# Altium PCB Khoa so dien tu.PcbDoc
Units mm, origin at the board's own origin, x right, y up, seen from the top; angles counter-clockwise.
Board outline 110.74 x 92.46 mm, 2 copper layers (Top Layer, Bottom Layer); 29 components, 32 nets, 111 pads, 12 vias.
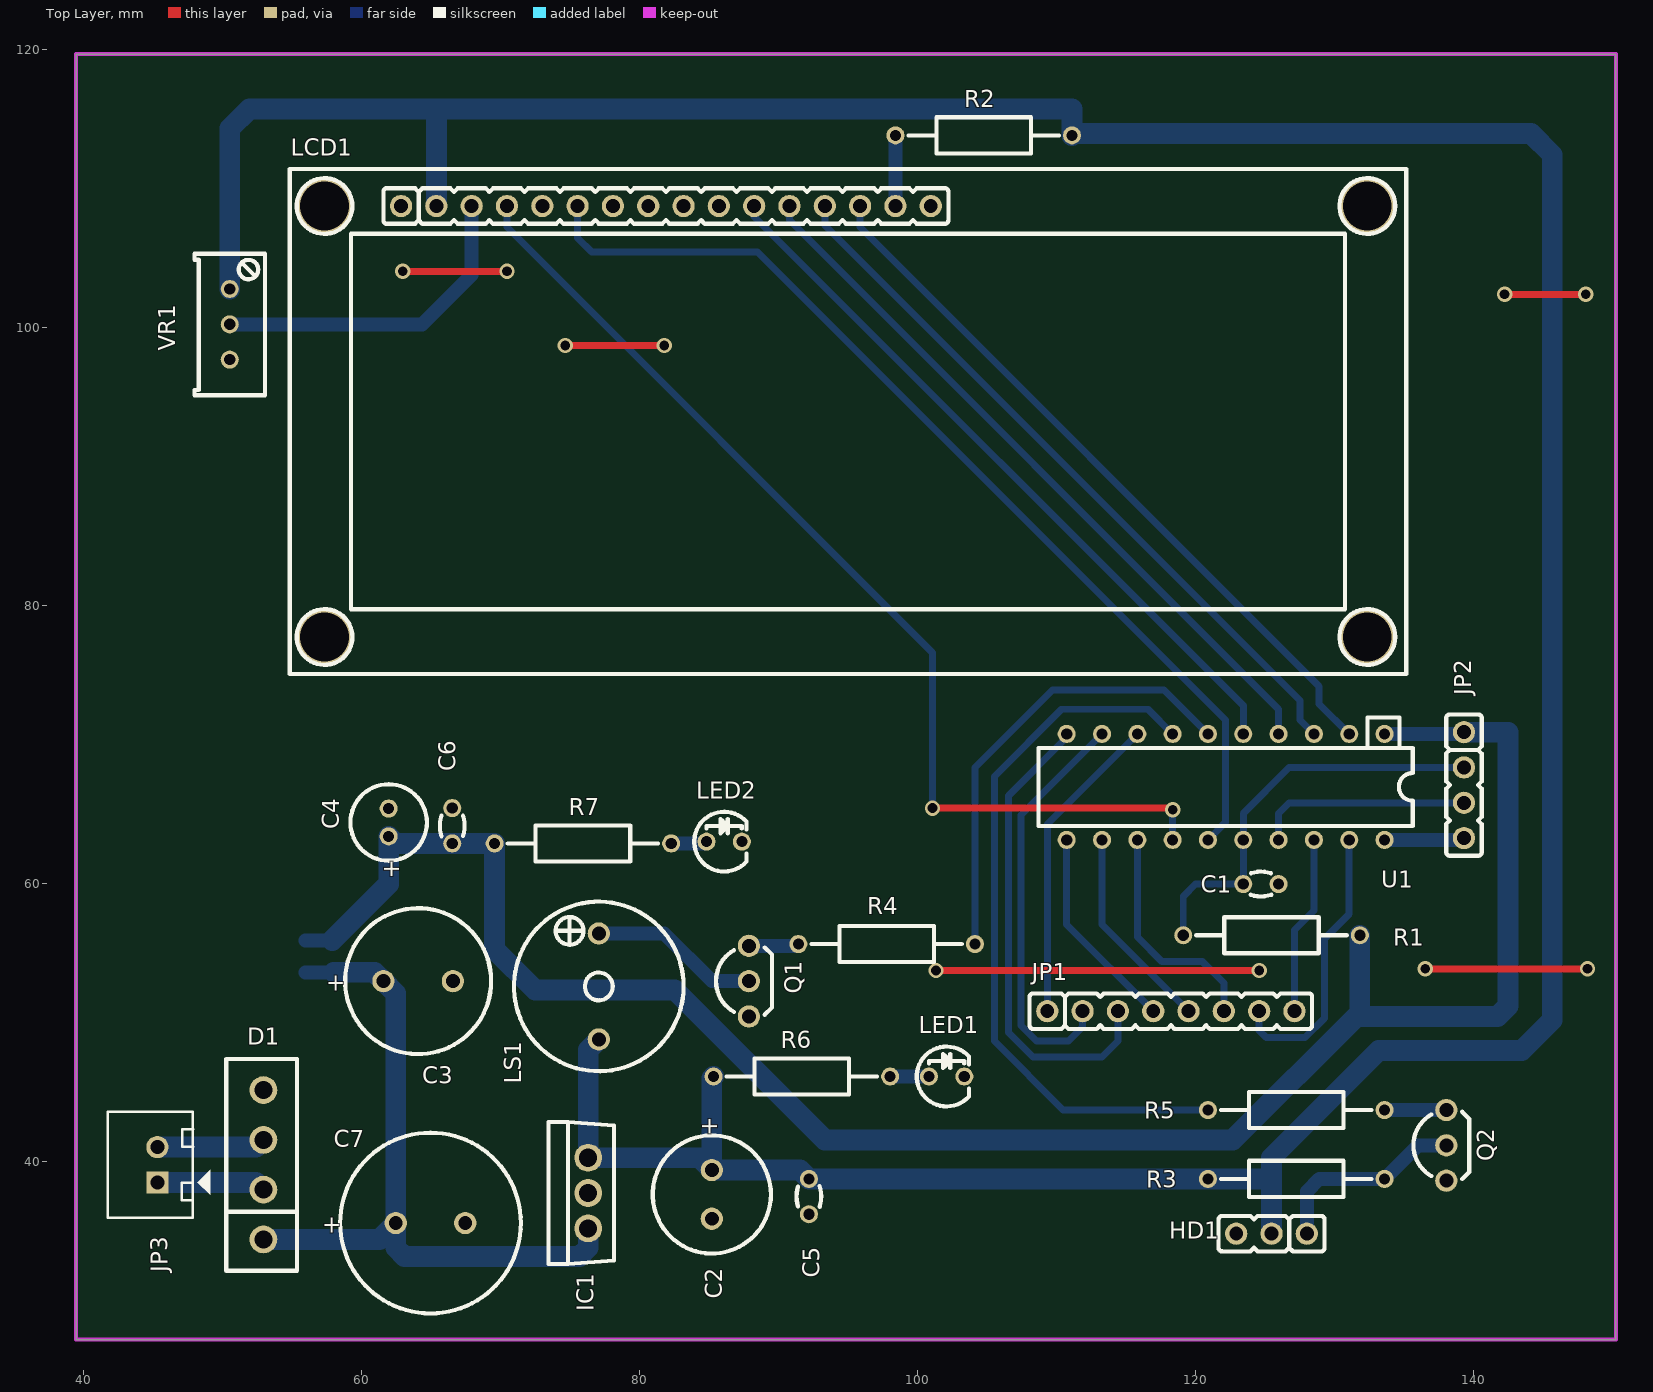
[diagram p0: Top Layer view]
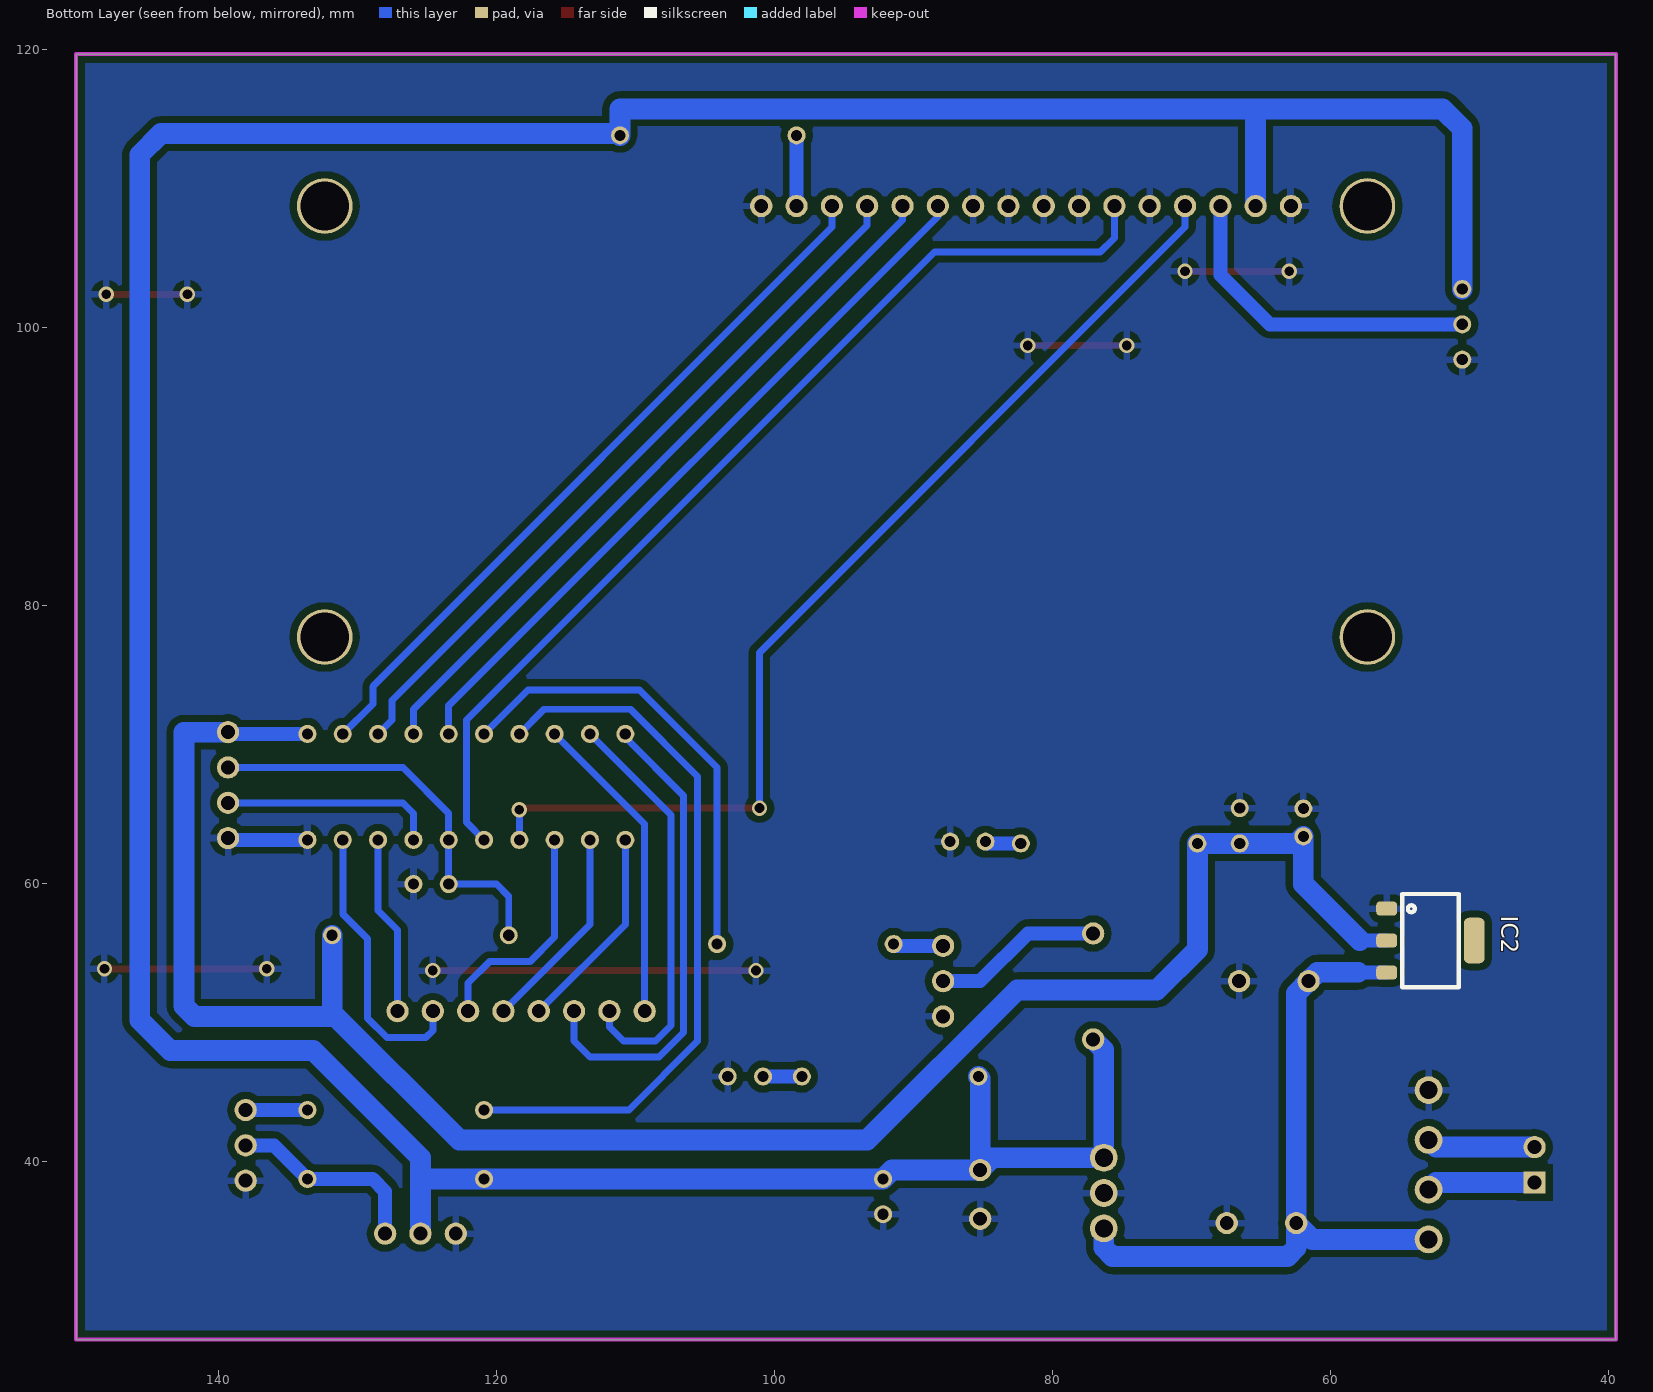
[diagram p1: Bottom Layer view, seen from below]
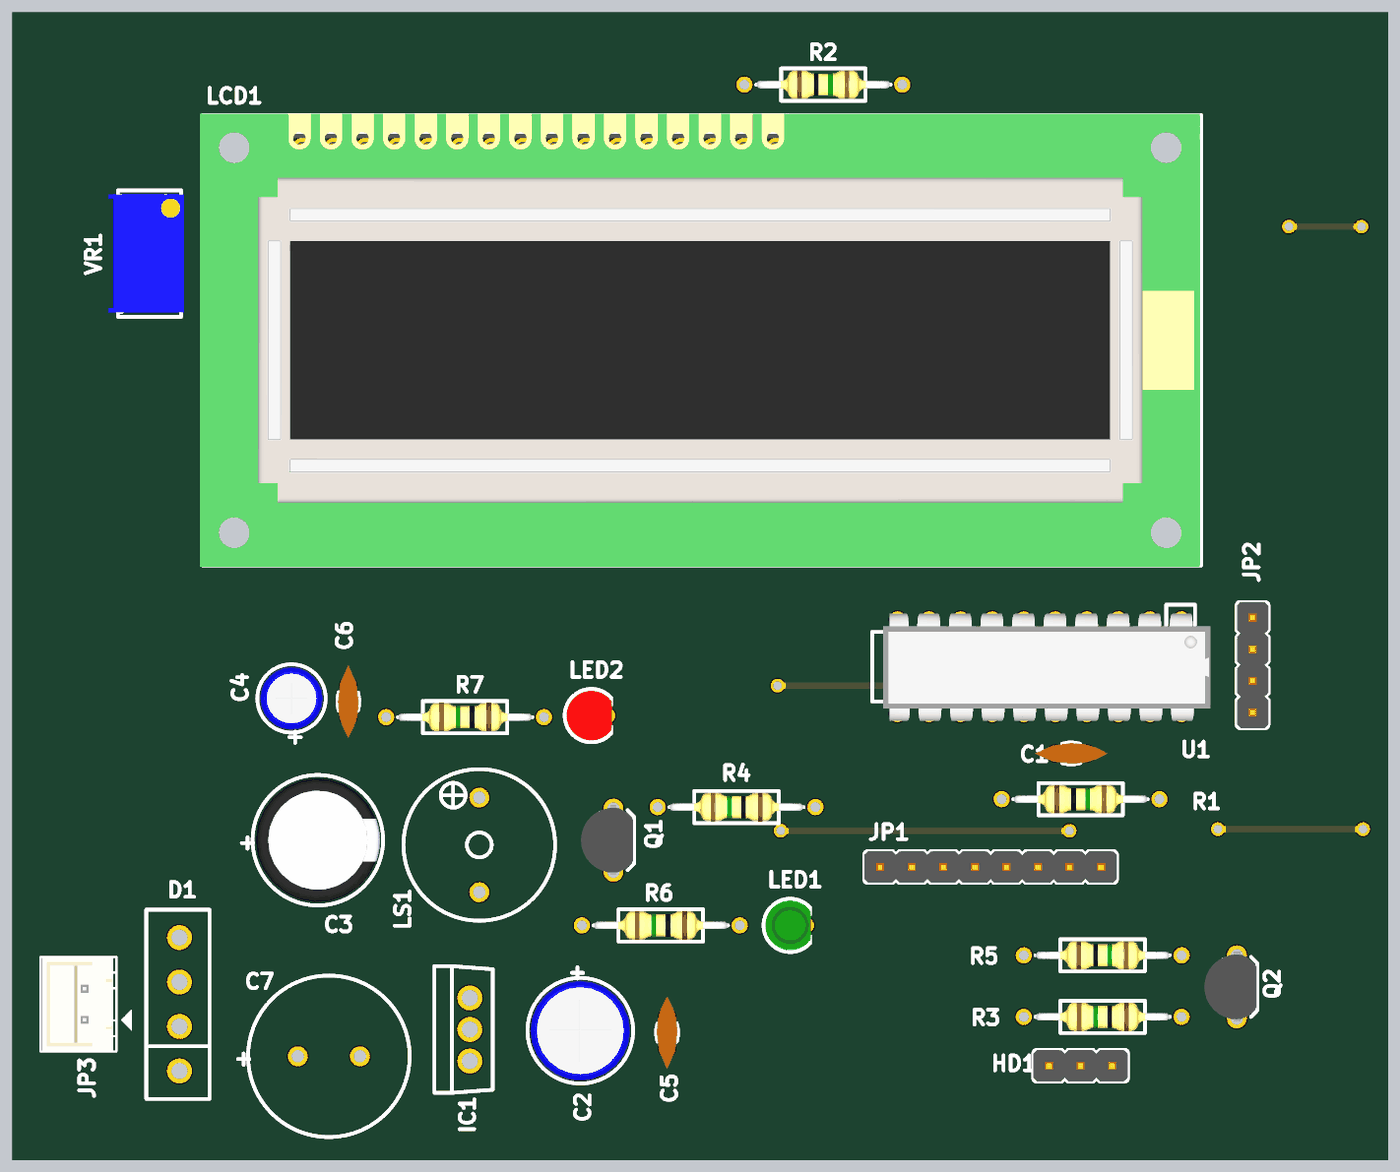
[diagram p2: 3D render of the assembled board from above, using the file's embedded part models]

## Layer stack, top to bottom
Top Layer: signal copper 0.0356
Dielectric: dielectric 0.32, FR-4, Dk 4.8
Bottom Layer: signal copper 0.0356

## Board outline
39.497,27.178 39.497,119.634 150.241,119.634 150.241,27.178

## Design rules (kind name [scope] priority, off if disabled: settings)
Clearance "Stitching GND" [IsStitchingVia and InNet('GND') vs (IsVia and (Not IsStitchingVia)) Or IsPad] p1: gap=0.5
Clearance [All] p2: gap=0.5
PlaneConnect [All] p1: planeconnectstyle=Relief reliefexpansion=0.5 reliefentries=4 reliefconductorwidth=0.5 reliefairgap=0.5
PolygonConnect [All] p1: connectstyle=Relief reliefconductorwidth=0.5 reliefentries=4 polygonreliefangle="90 Angle" airgapwidth=0.5
RoutingVias [All] p1: holewidth=0.3 width=0.7 viastyle="Through Hole" minholewidth=0.3 minwidth=0.7 maxholewidth=0.6 maxwidth=1.1
SolderMaskExpansion [All] p1: expansion=0.102
Width [All] p1: maxlimit=1.5 minlimit=0.5 preferedwidth=1
27 further rules are at their usual default settings.

## Components (designator, comment, footprint, x,y, rotation, side; value= is the part's Value field where it differs from the comment)
C1 "Cap" "Tu gom 104" 124.714,59.944 r0 top
C2 "Cap Pol1" CAP_470UF_16V 85.217,39.37 r270 top
C3 "Cap Pol1" CAP_470UF_25V 61.595,52.959 r0 top
C4 "Cap Pol1" CAP_22UF_16V 61.976,63.373 r90 top
C5 "Cap" "Tu gom 104" 92.202,37.465 r90 top
C6 "Cap" "Tu gom 104" 66.548,64.135 r270 top
C7 "Cap Pol1" CAP_2200UF_25V 62.484,35.56 r0 top
D1 "Bridge1" "BRIDGE DIODE 2A" 52.832,39.751 r90 top
HD1 "Motor servo" Header_3 125.476,34.798 r180 top
IC1 "LM7805" LM7805 76.327,37.719 r90 top
IC2 "AMS1117-3.3V" AMS1117-3.3V 52.832,55.88 r180 bottom
JP1 "Matrix key" Header_8 118.237,50.8 r0 top
JP2 "PROGRAM" Header_4 139.319,67.056 r270 top
JP3 "JP2" CON2 45.339,39.751 r90 top
LCD1 "LCD 16x2A" LCD16x2 62.865,108.712 r0 top
LED1 "GREEN" LED3G 100.838,46.101 r0 top
LED2 "RED" LED3R 84.836,62.992 r0 top
LS1 "Speaker" SPEAKER 77.089,56.388 r270 top
Q1 "2SC1815" 2SC1815 87.884,52.959 r90 top
Q2 "2SC1815" 2SC1815 138.049,41.148 r90 top
R1 "Res2" "RES 1/4W CFR25" 119.126,56.261 r0 top
R2 "Res2" "RES 1/4W CFR25" 98.425,113.792 r0 top
R3 "Res2" "RES 1/4W CFR25" 133.604,38.735 r180 top
R4 "Res2" "RES 1/4W CFR25" 104.14,55.626 r180 top
R5 "Res2" "RES 1/4W CFR25" 120.904,43.688 r0 top
R6 "Res2" "RES 1/4W CFR25" 98.044,46.101 r180 top
R7 "Res2" "RES 1/4W CFR25" 82.296,62.865 r180 top
U1 "MSP430G2553_PW_2" MSP430G2553 122.174,66.929 r180 top
VR1 "10K" VR1 50.546,102.743 r270 top

## Footprints (in the part's own frame and the unit in brackets; to place one, negate y for a bottom-side part, rotate by r counter-clockwise, add the part's x,y. Pads: shape width x height; smd on the part's side, far side on the other; paste and mask are expansions set on the pad)
2SC1815 [mm] "TO-92 Bent Lead, Flat Index; 3 In-Line, Axial Leads; Body Dia. 4.5mm; Leads 0.51 x 0.48 mm (max)"
  round 1.6 hole 1 mask+0.1: 1(-2.54,0) 2(0,0)
  round 1.6 hole 1: 3(2.54,0)
  silkscreen extent -2.41,-1.65 2.41,2.37, body extent -2.79,-1.59 2.79,2.61, height 10
AMS1117-3.3V [mm] "SOT223, 4-Leads, Body 6.7x7.3mm (max), Pitch 2.30mm, IPC Medium Density"
  rrect50% 1.5x1 smd: 1(-3.15,2.3) 2(-3.15,0) 3(-3.15,-2.3)
  rrect50% 1.5x3.28 smd: 4(3.15,0)
  silkscreen extent -2.03,-3.35 2.03,3.35
"BRIDGE DIODE 2A" [mm] "KBP206 bridge diode 2A"
  round 2 hole 1.3 mask+0.1: 1(-5.37,-0.13) 2(-1.79,-0.13) 3(1.79,-0.13) 4(5.37,-0.13)
  silkscreen extent -7.62,-2.54 7.62,2.54
CAP_22UF_16V [mm] "Capacitor, Electrolytic, Radial; Body 5 x 11 mm (Dia.xH typ); Pin Spacing 2 mm (typ)"
  round 1.3 hole 0.8: 1(0,0) 2(2,0)
  silkscreen extent -1.75,-2.75 3.75,2.75, body extent -1.53,-2.53 3.53,2.53, height 11.53
CAP_470UF_16V [mm] "Capacitor, Electrolytic, Radial; Body 8 x 11.5 mm (Dia.xH typ); Pin Spacing 3.5 mm (typ)"
  round 1.6 hole 1: 1(0,0) 2(3.5,0)
  silkscreen extent -2.5,-4.25 6,4.25, body extent -2.28,-4.03 5.78,4.03, height 12.03
CAP_470UF_25V [mm] "Capacitor, Electrolytic, Radial; Body 10 x 12.5 mm (Dia.xH typ); Pin Spacing 5 mm (typ)"
  round 1.6 hole 1: 1(0,0) 2(5,0)
  silkscreen extent -2.75,-5.25 7.75,5.25, body extent -2.5,-4.99 7.5,4.99, height 14.1
CAP_2200UF_25V [mm] "Capacitor, Electrolytic, Radial; Body 12.5 x 25 mm (Dia.xH typ); Pin Spacing 5 mm (typ)"
  round 1.6 hole 1: 1(0,0) 2(5,0)
  silkscreen extent -4,-6.5 9,6.5
CON2 [mm] "CON2"
  rect 1.6x1.6 hole 1 mask+0.1: 1(-1.27,0)
  round 1.6 hole 1 mask+0.1: 2(1.27,0)
  silkscreen extent -3.81,-3.8 3.81,3.56, body extent -3.75,-2.29 3.75,3.41, height 7
Header_3 [mm] "Connector DIP, 3Pin_2.54mm"
  round 1.6 hole 1 mask+0.1: 1(-2.54,0) 2(0,0) 3(2.54,0)
  silkscreen extent -3.81,-1.28 3.81,1.28, body extent -3.81,-1.27 3.81,1.27, height 10.1
Header_4 [mm] "Connector DIP, 4Pin_2.54mm"
  round 1.6 hole 1 mask+0.1: 1(-3.81,0) 2(-1.27,0) 3(1.27,0) 4(3.81,0)
  silkscreen extent -5.08,-1.28 5.08,1.28, body extent -5.08,-1.27 5.08,1.27, height 10.1
Header_8 [mm] "Connector DIP Male, 8Pin_2.54mm"
  round 1.6 hole 1 mask+0.1: 1(-8.89,0) 2(-6.35,0) 3(-3.81,0) 4(-1.27,0) 5(1.27,0) 6(3.81,0) 7(6.35,0) 8(8.89,0)
  silkscreen extent -10.16,-1.28 10.16,1.28, body extent -10.16,-1.27 10.16,1.27, height 10.1
LCD16x2 [mm] "LCD 16x2, 36.3mmx80.3mm"
  round 1.6 hole 1 mask+0.1: 1(0,0) 2(2.54,0) 3(5.08,0) 4(7.62,0) 5(10.16,0) 6(12.7,0) 7(15.24,0) 8(17.78,0) 9(20.32,0) 10(22.86,0) 11(25.4,0) 12(27.94,0) 13(30.48,0) 14(33.02,0) 15(35.56,0) 16(38.1,0)
  round 4 hole 3.5: Hole_0(-5.5,0) Hole_1(-5.5,-31) Hole_3(69.5,-31) Hole_4(69.5,0)
  silkscreen extent -8,-33.65 72.3,2.65, body extent -8.25,-33.75 72.25,2.75, height 10.52
LED3G [mm] "LED 3mm_GREEN"
  round 1.3 hole 0.8: 1(0,0) 2(2.54,0)
  silkscreen extent -0.88,-2.15 2.87,2.15, body extent -0.73,-2 2.94,2, height 4.6
LED3R [mm] "LED 3mm_RED"
  round 1.3 hole 0.8: 1(0,0) 2(2.54,0)
  silkscreen extent -0.88,-2.15 2.87,2.15, body extent -0.73,-2 2.94,2, height 4.6
LM7805 [mm] "POWER IC 7805"
  round 2 hole 1.3: 1(-2.54,0) 2(0,0) 3(2.54,0)
  silkscreen extent -5.1,-1.85 5.1,2.85
MSP430G2553 [mm] "DIP 20, 20 PIN, W 300mil, Pin to pin 100mil"
  round 1.3 hole 0.8: 1(-11.43,-3.81) 2(-8.89,-3.81) 3(-6.35,-3.81) 4(-3.81,-3.81) 5(-1.27,-3.81) 6(1.27,-3.81) 7(3.81,-3.81) 8(6.35,-3.81) 9(8.89,-3.81) 10(11.43,-3.81) 11(11.43,3.81) 12(8.89,3.81) 13(6.35,3.81) 14(3.81,3.81) 15(1.27,3.81) 16(-1.27,3.81) 17(-3.81,3.81) 18(-6.35,3.81) 19(-8.89,3.81) 20(-11.43,3.81)
  silkscreen extent -13.46,-5 13.46,2.8, body extent -13.74,-4.27 12.57,4.37, height 3.94
"RES 1/4W CFR25" [mm] "Axial Device, Thru-Hole; 2 Leads fi 0.55"
  round 1.3 hole 0.8 mask+0.1: 1(0,0) 2(12.7,0)
  silkscreen extent 0.94,-1.3 11.76,1.3, body extent 0.97,-1.16 11.74,1.16, height 2.93
SPEAKER [mm] "TMB12A05"
  round 1.6 hole 1 mask+0.1: 1(0,0) 2(7.62,0)
  silkscreen extent -2.29,-6.1 9.91,6.1
"Tu gom 104" [mm] "Capacitor, Radial, Tantalum, Non-Polarised; Body 3.05 x 1.78 x 3.43 mm (WxTxH max); Pin Spacing 2.54 mm (typ)"
  round 1.3 hole 0.8: 1(-1.27,0) 2(1.27,0)
  silkscreen extent -0.73,-0.89 0.76,0.89, body extent -2.92,-0.85 2.92,0.85, height 6.42
VR1 [mm] "Variable Resistor"
  round 1.3 hole 0.8 mask+0.1: 1(0,0) 2(2.54,0) 3(5.08,0)
  silkscreen extent -2.54,-2.54 7.65,2.54, body extent -2.22,-3.3 7.3,2.79, height 11.56

## Part data
C1 C5 C6: "Capacitor"
C2 C3 C4 C7: "Polarized Capacitor (Radial)"
D1: "Full Wave Diode Bridge"
HD1: library part Hed3, "Header 3 (Green)"
IC1: library part LM78xx, "On ap +, from + 5 to + 24VDC"
IC2: library part AMS1117
JP1: library part Con8, "Connector 8"
JP2: library part Con4, "Connector 4"
JP3: library part Con2, "Connector 2"
LCD1: library part LCD16x2A, "LCD dipslay 16 char, 2 line"
LED1 LED2: library part LED, "LED Single colour Green and Red"
LS1: "Loudspeaker"
Q1 Q2: "Trans NPN 50V 150mA TO-92"
R1 R2 R3 R4 R5 R6 R7: "Resistor"
U1: "Imported"
VR1: library part VR1, "Var Resistor"

## Via types
v1: diameter 1.1, hole 0.7, Top Layer to Bottom Layer, 12 vias

## Nets (pads, with @x,y where several pads share a name; then routed paths per layer and width w, separated by ;. In a path a pad name is that pad's centre, name@x,y a point inside that pad or via, vN(x,y) a via of type N, cw(c..) or ccw(c..) an arc to the next point about the centre after c; other vN are vias at no path point)
3V3: C4.1 C6.2 IC2.2 JP2.1 R1.2 R7.2 U1.1 | length 143.5
  Bottom Layer w1: IC2.2 57.912,55.88 ; U1.1 139.192,70.739 JP2.1
  Bottom Layer w1.5: 57.912,55.88 61.976,59.944 C4.1 62.484,62.865 C6.2 R7.2 69.596,55.245 72.517,52.324 82.55,52.324 93.345,41.529 122.682,41.529 131.826,50.673 R1.2 ; 131.826,50.419 141.732,50.419 142.494,51.181 142.494,70.866 JP2.1
5V: C2.1 C5.2 HD1.2 IC1.3 LCD1.2 LS1.2 R2.2 R3.2 R6.2 VR1.1 | length 274.3
  Bottom Layer w1.5: VR1.1 50.546,114.289 51.954,115.697 65.405,115.697 ; LCD1.2 65.405,115.697 ; LS1.2 76.327,48.006 IC1.3 84.328,40.259 C2.1 ; R6.2 85.217,45.974 C2.1 ; HD1.2 125.476,38.608 ; 65.405,115.697 111.125,115.697 R2.2 111.252,113.919 144.145,113.919 145.669,112.395 145.669,50.165 143.476,47.972 133.189,47.972 125.476,40.259 125.476,38.608 ; C2.1 91.567,39.37 C5.2 R3.2 125.349,38.735 125.476,38.608
9V: C3.1 C7.1 D1.1 IC1.1 IC2.3 | length 51.2
  Bottom Layer w1: IC2.3@55.996,53.594 58.039,53.594
  Bottom Layer w1.5: D1.1 61.305,34.381 C7.1 ; 58.039,53.594 60.96,53.594 C3.1 62.484,52.07 C7.1 ; IC1.1 76.327,33.782 75.692,33.147 63.119,33.147 62.484,33.782 C7.1
DATA4: LCD1.11 U1.5 | length 52.5
  Bottom Layer w0.5: LCD1.11 88.265,107.95 123.444,72.771 U1.5
DATA5: LCD1.12 U1.4 | length 52.5
  Bottom Layer w0.5: LCD1.12 90.805,107.696 125.984,72.517 U1.4
DATA6: LCD1.13 U1.3 | length 52.5
  Bottom Layer w0.5: LCD1.13 93.345,107.315 127.508,73.152 127.508,71.755 U1.3
DATA7: LCD1.14 U1.2 | length 52.5
  Bottom Layer w0.5: LCD1.14 95.885,107.188 128.905,74.168 128.905,72.898 U1.2
GND: C1.2 C2.2 C3.2 C4.2 C5.1 C6.1 C7.2 D1.4 HD1.3 IC1.2 IC2.1 JP2.4 LCD1.1 LCD1.5 LCD1.7 LCD1.8 LCD1.9 LCD1.10 LCD1.16 LED1.2 LED2.2 Q1.1 Q2.1 U1.20 VR1.3 | length 61.1
  Top Layer w0.5: v1(62.992,104.013) v1(70.485,104.013) ; v1(74.676,98.679) v1(81.788,98.679) ; v1(101.346,53.721) v1(124.587,53.721) ; v1(136.525,53.848) v1(148.209,53.848) ; v1(142.24,102.362) v1(148.082,102.362)
  Bottom Layer w1: U1.20 139.192,63.119 JP2.4
KEY1: JP1.1 U1.8 | length 22.6
  Bottom Layer w0.5: JP1.1 109.347,64.262 U1.8
KEY2: JP1.2 U1.9 | length 29.9
  Bottom Layer w0.5: JP1.2 111.887,49.657 110.871,48.641 108.585,48.641 107.442,49.784 107.442,64.897 U1.9
KEY3: JP1.3 U1.10 | length 34.4
  Bottom Layer w0.5: U1.10 110.744,70.485 106.553,66.294 106.553,49.276 108.331,47.498 113.284,47.498 114.427,48.641 JP1.3
KEY4: JP1.4 U1.11 | length 14.9
  Bottom Layer w0.5: U1.11 110.744,57.023 JP1.4
KEY5: JP1.5 U1.12 | length 14.9
  Bottom Layer w0.5: U1.12 113.284,57.023 JP1.5
KEY6: JP1.6 U1.13 | length 16.6
  Bottom Layer w0.5: U1.13 115.824,56.134 117.602,54.356 120.523,54.356 122.047,52.832 JP1.6
KEY7: JP1.7 U1.19 | length 20.4
  Bottom Layer w0.5: JP1.7 124.587,49.403 125.095,48.895 127.889,48.895 129.286,50.292 129.286,56.007 131.064,57.785 U1.19
KEY8: JP1.8 U1.18 | length 12.9
  Bottom Layer w0.5: JP1.8 127.127,56.642 128.524,58.039 U1.18
LCD_EN: LCD1.6 U1.15 | length 72.4
  Bottom Layer w0.5: LCD1.6 75.565,106.426 76.581,105.41 88.519,105.41 122.174,71.755 122.174,64.389 U1.15
LCD_RS: LCD1.4 U1.14 | length 75.5
  Top Layer w0.5: v1(101.092,65.405) 118.237,65.405 v1(118.364,65.278)
  Bottom Layer w0.5: LCD1.4 70.485,107.188 101.092,76.581 v1(101.092,65.405) ; U1.14 v1(118.364,65.278)
MOTOR: R5.1 U1.7 | length 52
  Bottom Layer w0.5: U1.7 116.586,72.517 110.363,72.517 105.537,67.691 105.537,48.641 110.49,43.688 R5.1
NetD1_2: D1.2 JP3.1 | length 7.8
  Bottom Layer w1.5: JP3.1 52.442,38.481 D1.2
NetD1_3: D1.3 JP3.2 | length 7.8
  Bottom Layer w1.5: JP3.2 52.442,41.021 D1.3
NetHD1_1: HD1.1 Q2.2 R3.1 | length 14.4
  Bottom Layer w1: HD1.1 128.016,37.846 128.905,38.735 R3.1 136.017,41.148 Q2.2
NetLCD1_3: LCD1.3 VR1.2 | length 23.8
  Bottom Layer w1: VR1.2 64.389,100.203 67.945,103.759 LCD1.3
NetLCD1_15: LCD1.15 R2.1 | length 5.1
  Bottom Layer w1: LCD1.15 R2.1
NetLED1_1: LED1.1 R6.1 | length 2.8
  Bottom Layer w1: R6.1 LED1.1
NetLED2_1: LED2.1 R7.1 | length 2.6
  Bottom Layer w1: R7.1 84.709,62.865 LED2.1
NetLS1_1: LS1.1 Q1.2 | length 12.2
  Bottom Layer w1: LS1.1 81.788,56.388 85.217,52.959 Q1.2
NetQ1_3: Q1.3 R4.2 | length 3.6
  Bottom Layer w1: Q1.3 91.313,55.499 R4.2
NetQ2_3: Q2.3 R5.2 | length 4.4
  Bottom Layer w1: R5.2 Q2.3
RST: C1.1 JP2.2 R1.1 U1.16 | length 29.8
  Bottom Layer w0.5: R1.1 119.126,59.055 120.015,59.944 C1.1 U1.16 123.444,65.024 126.746,68.326 JP2.2
SPEAKER: R4.1 U1.6 | length 33.1
  Bottom Layer w0.5: R4.1 104.14,68.326 109.728,73.914 117.729,73.914 U1.6
TEST: JP2.3 U1.17 | length 15.6
  Bottom Layer w0.5: U1.17 125.984,65.024 126.746,65.786 JP2.3
pads on no net: IC2.4 LCD1.Hole_0 LCD1.Hole_1 LCD1.Hole_3 LCD1.Hole_4

## Polygon pours and split planes (outlines as drawn)
GND on Bottom Layer "Bottom Overlay-No Net" (solid, remove dead copper, pour order 2): 39.497,119.38 39.751,119.634 150.114,119.634 150.114,27.686 150.241,27.559 150.114,27.432 39.497,27.432 39.497,119.634

## Keep-outs
Keep-Out Layer:
  the board outline again, w0.3

## Text inside footprints (layer, text, board x,y; h text height)
C2: Top Overlay "+" at 84.517,43.22 h1.2 r270; Mechanical 1 "+" at 84.517,41.42 h1.5 r270; Mechanical 1 "1" at 84.617,39.62 h1.2 r270; Mechanical 1 "2" at 84.617,36.22 h1.2 r270
C3: Top Overlay "+" at 57.495,52.259 h1.2; Mechanical 1 "+" at 59.395,52.159 h1.5; Mechanical 1 "1" at 61.395,52.459 h1.2; Mechanical 1 "2" at 66.195,52.359 h1.2
C4: Top Overlay "+" at 62.738,60.309 h1.2 r90; Mechanical 1 "+" at 62.476,61.873 h1 r90; Mechanical 1 "1" at 62.476,63.173 h1 r90; Mechanical 1 "2" at 62.476,65.073 h1 r90
C7: Top Overlay "+" at 57.184,34.86 h1.2; Mechanical 1 "2" at 67.184,34.96 h1.2; Mechanical 1 "1" at 62.284,34.96 h1.2; Mechanical 1 "+" at 59.584,34.86 h1.5
D1: Mechanical 1 "~" at 52.632,41.251 h1.2 r90; Mechanical 1 "~" at 52.632,37.551 h1.2 r90; Mechanical 1 "-" at 51.932,44.851 h1.2 r90; Mechanical 1 "+" at 51.832,34.051 h1.2 r90; Mechanical 1 "4" at 53.632,44.651 h1.2 r90; Mechanical 1 "1" at 53.532,34.251 h1.2 r90
HD1: Mechanical 1 "3" at 123.19,35.052 h1.2 r180; Mechanical 1 "1" at 128.27,35.052 h1.2 r180
IC1: Mechanical 1 "O" at 74.803,39.878 h1.2 r90; Mechanical 1 "G" at 74.803,37.338 h1.2 r90; Mechanical 1 "I" at 74.803,35.052 h1.2 r90
IC2: Mechanical 1 "1" at 54.407,58.4 h1.2 r90; Mechanical 1 "2" at 54.407,56.195 h1.2 r90; Mechanical 1 "3" at 54.407,53.99 h1.2 r90
JP1: Mechanical 1 "8" at 126.837,50.4 h1.2; Mechanical 1 "1" at 109.137,50.4 h1.2
JP2: Mechanical 1 "1" at 139.065,71.12 h1.2 r270; Mechanical 1 "4" at 139.065,63.5 h1.2 r270
LCD1: Mechanical 1 "16" at 100.415,108.312 h1.2; Mechanical 1 "1" at 62.715,108.312 h1.2
LS1: Mechanical 1 "2" at 76.489,49.068 h1.2 r270; Mechanical 1 "1" at 76.589,56.588 h1.2 r270
Q1: Mechanical 1 "E" at 88.265,50.165 h0.8 r90; Mechanical 1 "C" at 88.265,52.705 h0.8 r90; Mechanical 1 "B" at 88.265,55.245 h0.8 r90
Q2: Mechanical 1 "E" at 138.43,38.354 h0.8 r90; Mechanical 1 "C" at 138.43,40.894 h0.8 r90; Mechanical 1 "B" at 138.43,43.434 h0.8 r90
U1: Mechanical 1 "1" at 133.874,69.429 h1.2 r180; Mechanical 1 "10" at 111.474,69.329 h1.2 r180; Mechanical 1 "11" at 111.474,65.629 h1.2 r180; Mechanical 1 "20" at 134.574,65.629 h1.2 r180
VR1: Mechanical 1 "1" at 50.056,102.883 h1 r270; Mechanical 1 "2" at 50.016,100.503 h1 r270; Mechanical 1 "3" at 50.036,97.973 h1 r270